# Altium PCB EmitterControllerV1.PcbDoc
Units mm, origin at the board's own origin, x right, y up, seen from the top; angles counter-clockwise.
Board outline 23.12 x 21.25 mm, 2 copper layers (Top Layer, Bottom Layer); 30 components, 26 nets, 116 pads, 32 vias.
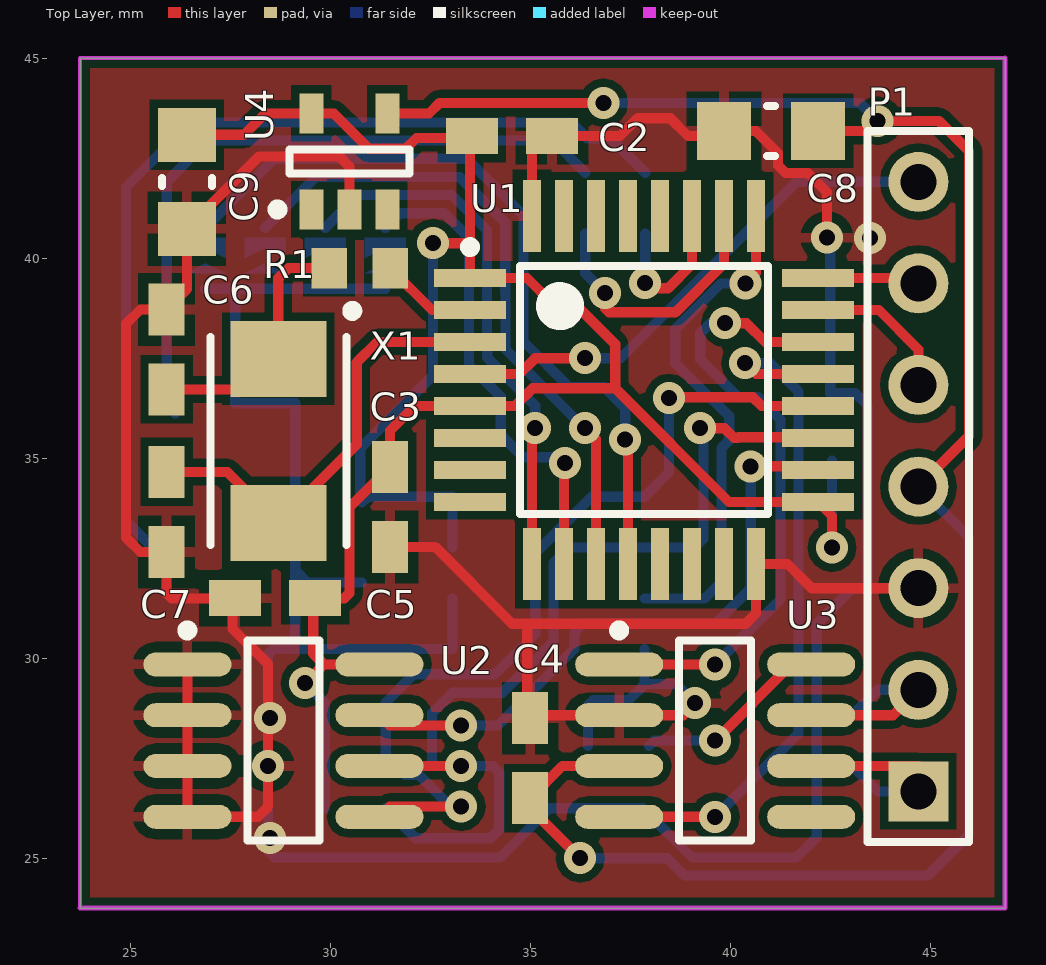
[diagram p0: Top Layer view]
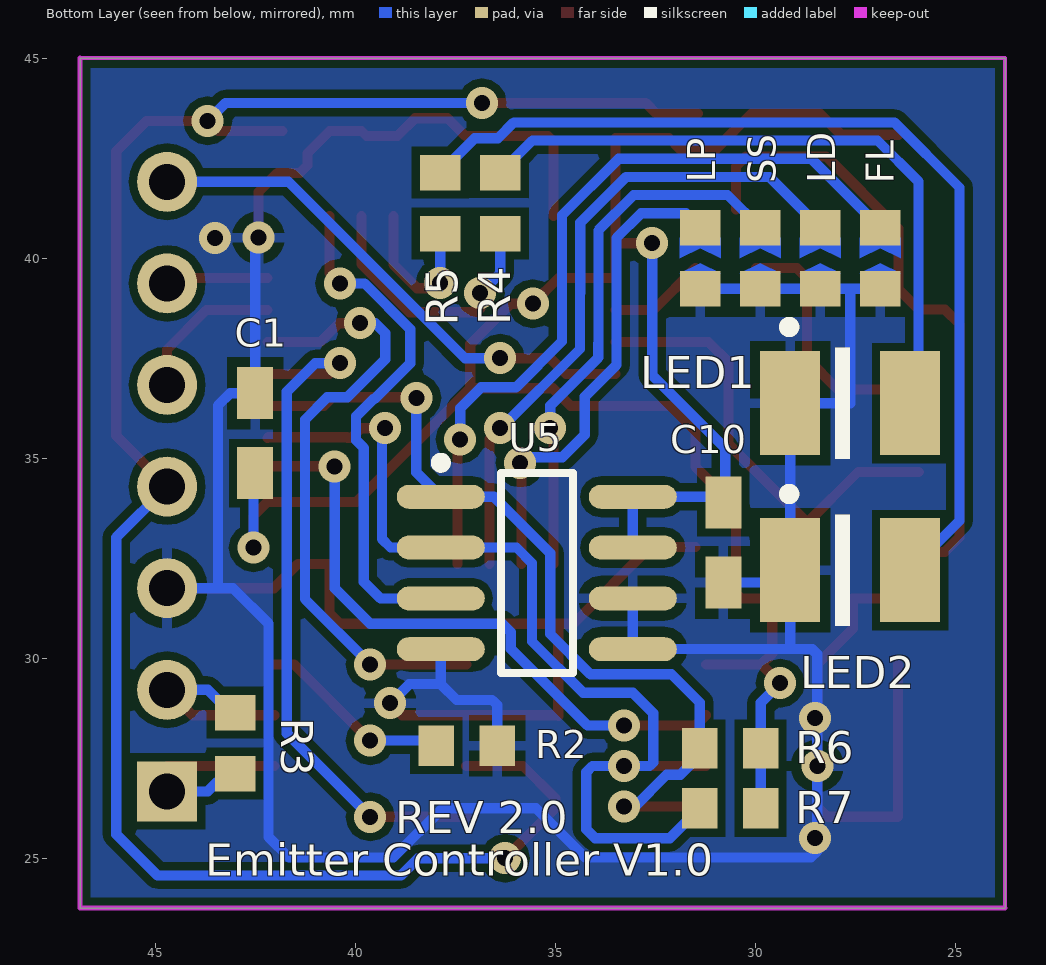
[diagram p1: Bottom Layer view, seen from below]

## Layer stack, top to bottom
Top Solder: solder mask 0.0102, Solder Resist, Dk 3.5
Top Layer: signal copper 0.0356
Dielectric 1: dielectric 0.32, FR-4, Dk 4.8
Bottom Layer: signal copper 0.0356
Bottom Solder: solder mask 0.0102, Solder Resist, Dk 3.5

## Board outline
23.75,23.75 46.875,23.75 46.875,45 23.75,45

## Design rules (kind name [scope] priority, off if disabled: settings)
Clearance [All] p1: gap=0.2
MinimumSolderMaskSliver [All] p1: minsoldermaskwidth=0.1
PolygonConnect [All] p1: connectstyle=Relief reliefconductorwidth=0.254 reliefentries=4 polygonreliefangle="90 Angle" airgapwidth=0.254
RoomDefinition LaserLEDController [InComponentClass('LaserLEDController')] p1: confinementstyle=ConfineIn formatcopy=TRUE lockcomponents=FALSE outline 23.75,23.75 46.875,23.75 46.875,45 23.75,45
RoutingVias [All] p1: holewidth=0.711 width=1.27 viastyle="Through Hole" minholewidth=0.4 minwidth=0.8 maxholewidth=0.711 maxwidth=1.27
SilkToSolderMaskClearance [IsPad] p1: minsilkscreentomaskgap=0 clearancetoexposedcopper=TRUE
SolderMaskExpansion [All] p1: expansion=0.102
Width [All] p1: maxlimit=0.254 minlimit=0.254 preferedwidth=0.254
28 further rules are at their usual default settings.

## Components (designator, comment, footprint, x,y, rotation, side; value= is the part's Value field where it differs from the comment)
C1 "ChipCap" CAP0603 42.5,35.625 r270 bottom
C2 "ChipCap" CAP0603 34.544,43.053 r180 top
C3 "ChipCap" CAP0603 31.496,33.782 r90 top
C4 "ChipCap" CAP0603 35,27.5 r90 top
C5 "ChipCap" CAP0603 28.625,31.5 r0 top
C6 "ChipCap" CAP0603 25.908,37.719 r270 top
C7 "ChipCap" CAP0603 25.908,33.655 r90 top
C8 "ChipCap" CAP0805 41.021,43.18 r0 top
C9 "ChipCap" CAP0805 26.416,41.91 r90 top
C10 "ChipCap" CAP0603 30.796,32.893 r90 bottom
FL "Jumper" J0603 26.875,40 r90 bottom
LD "Jumper" J0603 28.375,40 r90 bottom
LED1 "LED 0603" PLCC-2 27.625,36.375 r180 bottom
LED2 "LED 0603" PLCC-2 27.625,32.2 r180 bottom
LP "Jumper" J0603 31.375,40 r90 bottom
P1 "Header 7" HDR1X7 44.704,26.67 r90 top
R1 "ChipRes" RES0603 30.734,39.751 r180 top
R2 "ChipRes" RES0603 37.211,27.813 r0 bottom
R3 "ChipRes" RES0603 43,27.875 r270 bottom
R4 "ChipRes" RES0603 36.375,41.375 r270 bottom
R5 "ChipRes" RES0603 37.875,41.375 r270 bottom
R6 "ChipRes" RES0603 30.625,27.75 r0 bottom
R7 "ChipRes" RES0603 30.625,26.25 r0 bottom
SS "Jumper" J0603 29.875,40 r90 bottom
U1 "STM32F042K6T6" LQFP32 37.846,36.703 r0 top
U2 "M24256" SOIC8 28.829,27.94 r0 top
U3 "MCP2551" SOIC8 39.624,27.94 r0 top
U4 "ST715M33R" SOT23-5 30.48,42.418 r90 top
U5 "DS1631" SOIC8 35.46,32.131 r180 bottom
X1 "XTAL" "ABM3 Ceramic Crystal" 28.702,35.433 r270 top

## Footprints (in the part's own frame and the unit in brackets; to place one, negate y for a bottom-side part, rotate by r counter-clockwise, add the part's x,y. Pads: shape width x height; smd on the part's side, far side on the other; paste and mask are expansions set on the pad)
"ABM3 Ceramic Crystal" [mm]
  rect 1.9x2.4 smd: 1(-2.05,0) 2(2.05,0)
  silkscreen extent -3.37,-1.7 2.6,1.97, body extent -2.5,-1.6 2.5,1.6, height 1.3
CAP0603 [mm]
  rect 1.3x0.9 smd: 1(-1,0) 2(1,0)
  body extent -1.15,-0.4 1.15,0.4, height 0.55
CAP0805 [mm]
  rect 1.35x1.45 smd: 1(-1.175,0) 2(1.175,0)
  silkscreen extent -0.1,-0.63 0.1,0.63, body extent -1,-0.62 1,0.63, height 0.3
HDR1X7 [mm] "Connector; Header; 7 Position"
  rect 1.5x1.5 hole 0.9: 1(0,0)
  round 1.5 hole 0.9: 2(2.54,0) 3(5.08,0) 4(7.62,0) 5(10.16,0) 6(12.7,0) 7(15.24,0)
  silkscreen extent -1.27,-1.27 16.51,1.27
J0603 [mil]
  rect 35x40 smd: 1(-30,0) 2(30,0)
  Top Layer region: -15,-20 -15,20 -5,0
  Top Layer region: 0,20 10,0 0,-20 20,-20 20,20
LQFP32 [mm] "LQFP, 32-Leads, Body 7.00x7.00mm, Pitch 0.80mm, IPC Medium Density"
  rect 1.8x0.45 smd: 1(-4.35,2.8) 2(-4.35,2) 3(-4.35,1.2) 4(-4.35,0.4) 5(-4.35,-0.4) 6(-4.35,-1.2) 7(-4.35,-2) 8(-4.35,-2.8) 17(4.35,-2.8) 18(4.35,-2) 19(4.35,-1.2) 20(4.35,-0.4) 21(4.35,0.4) 22(4.35,1.2) 23(4.35,2) 24(4.35,2.8)
  rect 0.45x1.8 smd: 9(-2.8,-4.35) 10(-2,-4.35) 11(-1.2,-4.35) 12(-0.4,-4.35) 13(0.4,-4.35) 14(1.2,-4.35) 15(2,-4.35) 16(2.8,-4.35) 25(2.8,4.35) 26(2,4.35) 27(1.2,4.35) 28(0.4,4.35) 29(-0.4,4.35) 30(-1.2,4.35) 31(-2,4.35) 32(-2.8,4.35)
  silkscreen extent -4.47,-3.1 3.1,3.7, body extent -4.57,-4.57 4.57,4.57, height 1.62
PLCC-2 [mm]
  rect 1.5x2.6 smd: 1(-1.5,0) 2(1.5,0)
  silkscreen extent -1.65,-1.4 0,2.03, body extent -1.75,-1.4 1.75,1.4, height 1.91
RES0603 [mil]
  rect 35x40 smd: 1(-30,0) 2(30,0)
SOIC8 [mm] "SOIC, 8-Leads, Body 4,90x3,90mm, Pitch 1,27mm, IPC Medium Density"
  oval 2.2x0.6 smd: 1(-2.4,1.905) 2(-2.4,0.635) 3(-2.4,-0.635) 4(-2.4,-1.905) 5(2.4,-1.905) 6(2.4,-0.635) 7(2.4,0.635) 8(2.4,1.905)
  silkscreen extent -2.52,-2.5 0.9,2.88, body extent -3,-2.45 3,2.45, height 1.61
SOT23-5 [mm] "SOT23, 5-Leads, Body 2.90x2.45mm, Pitch 0.95mm, IPC Medium Density"
  rect 1x0.6 smd: 1(-1.2,0.95) 2(-1.2,0) 3(-1.2,-0.95) 4(1.2,-0.95) 5(1.2,0.95)
  silkscreen extent -1.32,-1.5 0.3,1.92, body extent -1.4,-1.45 1.4,1.45, height 1.24

## Part data
C1 C2 C3 C4 C5 C6 C7 C8 C9 C10: "Capacitor"
LED1 LED2: library part LED0603
P1: "Header, 7-Pin"
R1 R2 R3 R4 R5 R6 R7: "Chip resistor"
U1: "ARM Cortex-M0 Microcontroller"
U2: "256 Kbit I2C EEPROM"
U3: library part MCP2551-I/SN, "CAN Transceiver"
U4: "High input voltage - 85 mA LDO linear regulator"
U5: "High-Precision Digital  Thermometer and Thermostat"
X1: library part "ABM3 Ceramic SMD Crystal", "Quartz crystall oscillator"

## Via types
v1: diameter 0.8, hole 0.4, Top Layer to Bottom Layer, tented both sides, 32 vias

## Nets (pads, with @x,y where several pads share a name; then routed paths per layer and width w, separated by ;. In a path a pad name is that pad's centre, name@x,y a point inside that pad or via, vN(x,y) a via of type N, cw(c..) or ccw(c..) an arc to the next point about the centre after c; other vN are vias at no path point)
5V: C4.1 C8.2 P1.4 U3.3 U4.4 | length 50.2
  Top Layer w0.254: U4.4 32.47,43.618 32.736,43.884 v1(36.83,43.884) ; v1(36.25,25) 35,26.25 C4.1 35.805,27.305 U3.3 ; C8.2@41.815,43.18 43.434,43.18 v1(43.688,43.434) 45.212,43.434 45.974,42.672 45.974,35.56 P1.4
  Bottom Layer w0.254: v1(36.25,25) 38.423,25 38.858,24.565 44.94,24.565 45.974,25.599 45.974,33.02 P1.4 ; v1(36.83,43.884) 43.238,43.884 v1(43.688,43.434)
CAN_RX: U1.21 U3.4 | length 17.5
  Top Layer w0.254: U3.4 v1(39.624,26.035) ; v1(40.375,37.375) 40.648,37.103 U1.21
  Bottom Layer w0.254: v1(39.624,26.035) 41.71,28.121 41.71,36.665 41,37.375 v1(40.375,37.375)
CAN_TX: U1.22 U3.1 | length 15.7
  Top Layer w0.254: U3.1 v1(39.624,29.845) ; v1(39.875,38.375) 40.403,38.375 40.876,37.903 U1.22
  Bottom Layer w0.254: v1(39.624,29.845) 41.256,31.477 41.256,35.965 40.698,36.523 40.199,36.523 39.25,37.472 39.25,38.125 39.5,38.375 v1(39.875,38.375)
CANH: P1.2 R3.1 U3.7 | length 4.7
  Top Layer w0.254: U3.7 44.069,28.575 P1.2
  Bottom Layer w0.254: R3.1@43.18,28.702 43.688,29.21 P1.2
CANL: P1.1 R3.2 U3.6 | length 5
  Top Layer w0.254: U3.6 44.704,27.305 P1.1
  Bottom Layer w0.254: R3.2@43.18,27.178 43.688,26.67 P1.1
GND: C1.1 C2.1 C3.1 C4.2 C5.1 C6.1 C7.1 C8.1 C9.1 C10.1 FL.1 LD.1 LED1.1 LED2.1 LP.1 P1.3 R2.1 SS.1 U1.16 U1.32 U2.1 U2.2 U2.3 U2.4 U3.2 U4.2 U5.4 U5.5 U5.6 | length 129.5
  Top Layer w0.254: U2.1 U2.2 U2.3 U2.4 28.194,26.035 28.448,26.289 v1(28.448,27.305) 28.448,29.845 27.559,30.734 27.559,31.48 27.575,31.496 26.035,31.496 25.908,31.623 C7.1 25.257,32.655 24.892,33.02 24.892,38.354 25.257,38.719 C6.1 26.416,39.227 C9.1 28.226,42.545 30.226,42.545 30.48,42.291 U4.2 ; C3.1 32.623,32.782 34.544,30.861 40.386,30.861 40.646,31.121 U1.16 41.434,32.353 42.037,31.75 P1.3 ; 34.925,30.861 34.925,28.559 34.941,28.575 U3.2 38.825,28.575 v1(39.125,28.875) ; U1.32 35.046,42.92 35.179,43.053 C2.1 37.246,43.053 37.693,43.5 38.5,43.5 38.947,43.053 39.719,43.053 C8.1 40.64,43.18 41.194,42.626 41.194,42.32 41.386,42.128 41.946,42.128 42.418,41.656 v1(42.418,40.513)
  Bottom Layer w0.254: FL.1 27.625,39.238 ; C10.1 29.432,31.893 LED2.1 ; LP.1 SS.1 LD.1 27.625,39.238 ; U5.6 U5.5 29.125,30.226 ; R2.1 36.449,28.829 36.576,28.956 37.465,28.956 37.86,29.351 ; U5.4 37.86,29.351 ; v1(39.125,28.875) 38.649,29.351 37.86,29.351 ; v1(42.418,40.513) 42.5,40.431 C1.1 43.125,36.625 43.434,36.316 43.434,31.75 ; P1.3 43.434,31.75 ; 27.625,39.238 27.625,36.375 LED1.1 LED2.1 ; 29.125,30.226 28.575,30.226 28.448,30.099 v1(28.448,27.305) 28.448,25.177 28.606,25.019 34.25,25.019 35.481,26.25 37.815,26.25 39.046,25.019 41.656,25.019 42.164,25.527 42.164,30.861 43.053,31.75 43.434,31.75 ; 29.125,30.226 LED2.1
  other v1: 28.5,25.5 28.5,28.5 43.5,40.5
I2C1_SCL: R7.2 U1.19 U2.6 U5.2 | length 25.3
  Top Layer w0.254: U2.6 v1(33.274,27.305) ; v1(39.25,35.75) 39.854,35.75 40.102,35.503 40.19,35.503 40.212,35.525 42.174,35.525 U1.19
  Bottom Layer w0.254: R7.2 32.137,25.5 34,25.5 34.225,25.725 34.225,27.15 34.07,27.305 v1(33.274,27.305) 32.639,27.305 32.547,27.397 32.547,28.622 33.062,29.137 34.3,29.137 35.579,30.416 35.579,32.377 35.968,32.766 U5.2 39.116,32.766 39.332,32.982 39.332,35.669 v1(39.25,35.75)
I2C1_SDA: R6.2 U1.20 U2.5 U5.1 | length 22.2
  Top Layer w0.254: U2.5 31.483,26.289 v1(33.274,26.289) ; v1(38.466,36.506) 38.484,36.523 40.566,36.523 40.786,36.303 U1.20
  Bottom Layer w0.254: v1(33.274,26.289) 33.013,26.289 32.217,27.085 31.875,27.085 31.387,27.573 R6.2 31.387,28.893 32.093,29.599 34.12,29.599 35.125,30.604 35.125,32.625 36.536,34.036 U5.1 38.472,34.648 38.472,36.5 v1(38.466,36.506)
J_FL: FL.2 U1.12 | length 19.5
  Top Layer w0.254: U1.12 v1@37.446,35.401
  Bottom Layer w0.254: FL.2 28.6,42.487 33.415,42.487 34.829,41.073 34.829,39.629 34.833,39.625 34.833,37.917 35.977,36.773 36.852,36.773 37.375,36.25 v1(37.375,35.472)
J_LD: LD.2 U1.11 | length 16.5
  Top Layer w0.254: v1(36.375,35.75) 36.646,35.479 U1.11
  Bottom Layer w0.254: LD.2 29.646,42.033 33.227,42.033 34.375,40.885 34.375,39.129 34.379,39.125 34.379,37.729 36.358,35.75 v1(36.375,35.75)
J_LP: LP.2 U1.10 | length 12.3
  Top Layer w0.254: U1.10 v1@35.846,34.852
  Bottom Layer w0.254: LP.2@31.375,40.875 LP.2 31.738,41.125 32.851,41.125 33.467,40.509 33.467,37.686 33.471,37.682 33.471,37.327 34.263,36.535 34.263,35.584 34.824,35.023 35.733,35.023 v1(35.875,34.881)
J_SS: SS.2 U1.9 | length 13.6
  Top Layer w0.254: U1.9 35.046,35.671 v1(35.125,35.75)
  Bottom Layer w0.254: SS.2 30.692,41.579 33.039,41.579 33.921,40.697 33.921,37.874 33.925,37.87 33.925,37.515 35.125,36.315 v1(35.125,35.75)
NetC6_2: C6.2 R1.2 X1.1 | length 6.5
  Top Layer w0.254: C6.2 27.938,36.719 X1.1 28.702,39.497 28.956,39.751 R1.2
NetC7_2: C7.2 U1.3 X1.2 | length 11.2
  Top Layer w0.254: C7.2 27.43,34.655 X1.2 30.665,35.346 30.665,37.396 31.172,37.903 U1.3 U1.3@33.464,37.871
NetLED1_2: LED1.2 R4.1 | length 17.1
  Bottom Layer w0.254: LED1.2@26.125,36.125 25.915,36.335 25.915,41.915 26.941,42.941 35.571,42.941 R4.1
NetLED2_2: LED2.2 R5.1 | length 24.3
  Bottom Layer w0.254: LED2.2 24.892,33.433 24.892,41.767 26.52,43.395 36.033,43.395 36.428,43 37.012,43 R5.1
NetR1_1: R1.1 U1.2 | length 2.4
  Top Layer w0.254: R1.1 32.544,38.703 U1.2
NetR2_2: R2.2 U3.8 | length 4.9
  Top Layer w0.254: v1(39.624,27.94) 41.529,29.845 U3.8
  Bottom Layer w0.254: R2.2 38.1,27.94 v1(39.624,27.94)
NetR4_2: R4.2 U1.26 | length 6.8
  Top Layer w0.254: v1(36.875,39.125) 36.875,38.75 36.977,38.648 38.636,38.648 39.846,39.858 U1.26
  Bottom Layer w0.254: R4.2 36.375,39.625 v1(36.875,39.125)
NetR5_2: R5.2 U1.27 | length 4
  Top Layer w0.254: v1(37.875,39.375) 37.875,39.25 38.447,39.25 39.046,39.849 U1.27
  Bottom Layer w0.254: v1@37.875,39.376 R5.2
NetU1_18: U1.18 U2.7 | length 15.8
  Top Layer w0.254: U2.7 31.483,28.321 v1(33.274,28.321) ; v1(40.513,34.798) 42.101,34.798 U1.18
  Bottom Layer w0.254: v1(33.274,28.321) 34.196,28.321 36.109,30.234 36.109,30.648 36.322,30.861 39.624,30.861 40.513,31.75 v1(40.513,34.798)
NRESET: P1.7 U1.4 | length 13.2
  Top Layer w0.254: U1.4 34.728,37.103 35.125,37.5 v1(36.375,37.5)
  Bottom Layer w0.254: v1(36.375,37.5) 37.257,37.5 41.667,41.91 P1.7
SWDCLK: P1.6 U1.24 | length 2.6
  Top Layer w0.254: U1.24 44.571,39.503 P1.6
SWDIO: P1.5 U1.23 | length 3.8
  Top Layer w0.254: U1.23 43.72,38.703 44.704,37.719 P1.5
TOUT: U1.25 U5.3 | length 13.1
  Top Layer w0.254: v1(40.386,39.37) 40.646,39.63 U1.25
  Bottom Layer w0.254: U5.3 39.37,31.496 39.786,31.912 39.786,35.258 39.977,35.449 39.977,36.051 39.551,36.477 39.523,36.477 38.625,37.375 38.625,38.226 39.769,39.37 v1(40.386,39.37)
VCC: C1.2 C2.2 C3.2 C5.2 C9.2 C10.2 R6.1 R7.1 U1.1 U1.5 U1.17 U2.8 U4.5 U5.7 U5.8 | length 56.6
  Top Layer w0.254: C9.2 27.845,43.085 28.378,43.618 U4.5 30.091,43.618 30.972,42.737 31.888,42.737 32.156,43.005 33.496,43.005 33.496,40.375 ; v1(29.375,29.375) 29.845,29.845 ; U2.8 29.845,29.845 ; v1(32.574,40.374) 33.495,40.374 33.496,40.375 ; v1(42.545,32.766) 42.545,33.554 U1.17 39.972,33.903 37.125,36.75 ; 29.845,29.845 29.575,30.115 29.575,31.496 30.353,31.496 30.48,31.623 30.48,33.766 C3.2 31.496,35.687 32.112,36.303 U1.5 34.613,36.303 35.06,36.75 37.125,36.75 ; 33.496,40.375 U1.1 34.919,39.503 v1(35.56,38.862) 36.11,38.862 37.125,37.847 37.125,36.75
  Bottom Layer w0.254: v1(29.375,29.375) 29.863,28.887 R6.1 R7.1 ; v1(32.574,40.374) 32.574,37.074 30.75,35.25 30.75,33.939 C10.2 30.939,34.036 U5.8 U5.7 ; C1.2 42.545,34.58 v1(42.545,32.766) ; C1.2@42.545,34.814 C1.2@42.545,34.941
pads on no net: U1.6 U1.7 U1.8 U1.13 U1.14 U1.15 U1.28 U1.29 U1.30 U1.31 U3.5 U4.1 U4.3

## Polygon pours and split planes (outlines as drawn)
GND on Top Layer "Keep-Out Layer-No Net" (solid): 23.75,23.75 46.875,23.75 46.875,45 23.75,45
GND on Bottom Layer "Keep-Out Layer-No Net 1" (solid, pour order 0): 23.75,23.75 46.875,23.75 46.875,45 23.75,45

## Keep-outs
Keep-Out Layer:
  the board outline again, w0.1

## Silkscreen, mask and mechanical layers (free items; w line width, h text height)
Bottom Overlay:
  text "REV 2.0" at 39,25.625 h0.8
  text "Emitter Controller V1.0" at 43.75,24.565 h0.8